# Altium PCB Posha_4 layers.PcbDoc
Units mm, origin at the board's own origin, x right, y up, seen from the top; angles counter-clockwise.
Board outline 60.96 x 45.21 mm, 4 copper layers (Top Layer, Layer 1, Layer 2, Bottom Layer), stack 0.603 mm thick; 42 components, 28 nets, 187 pads, 46 vias.
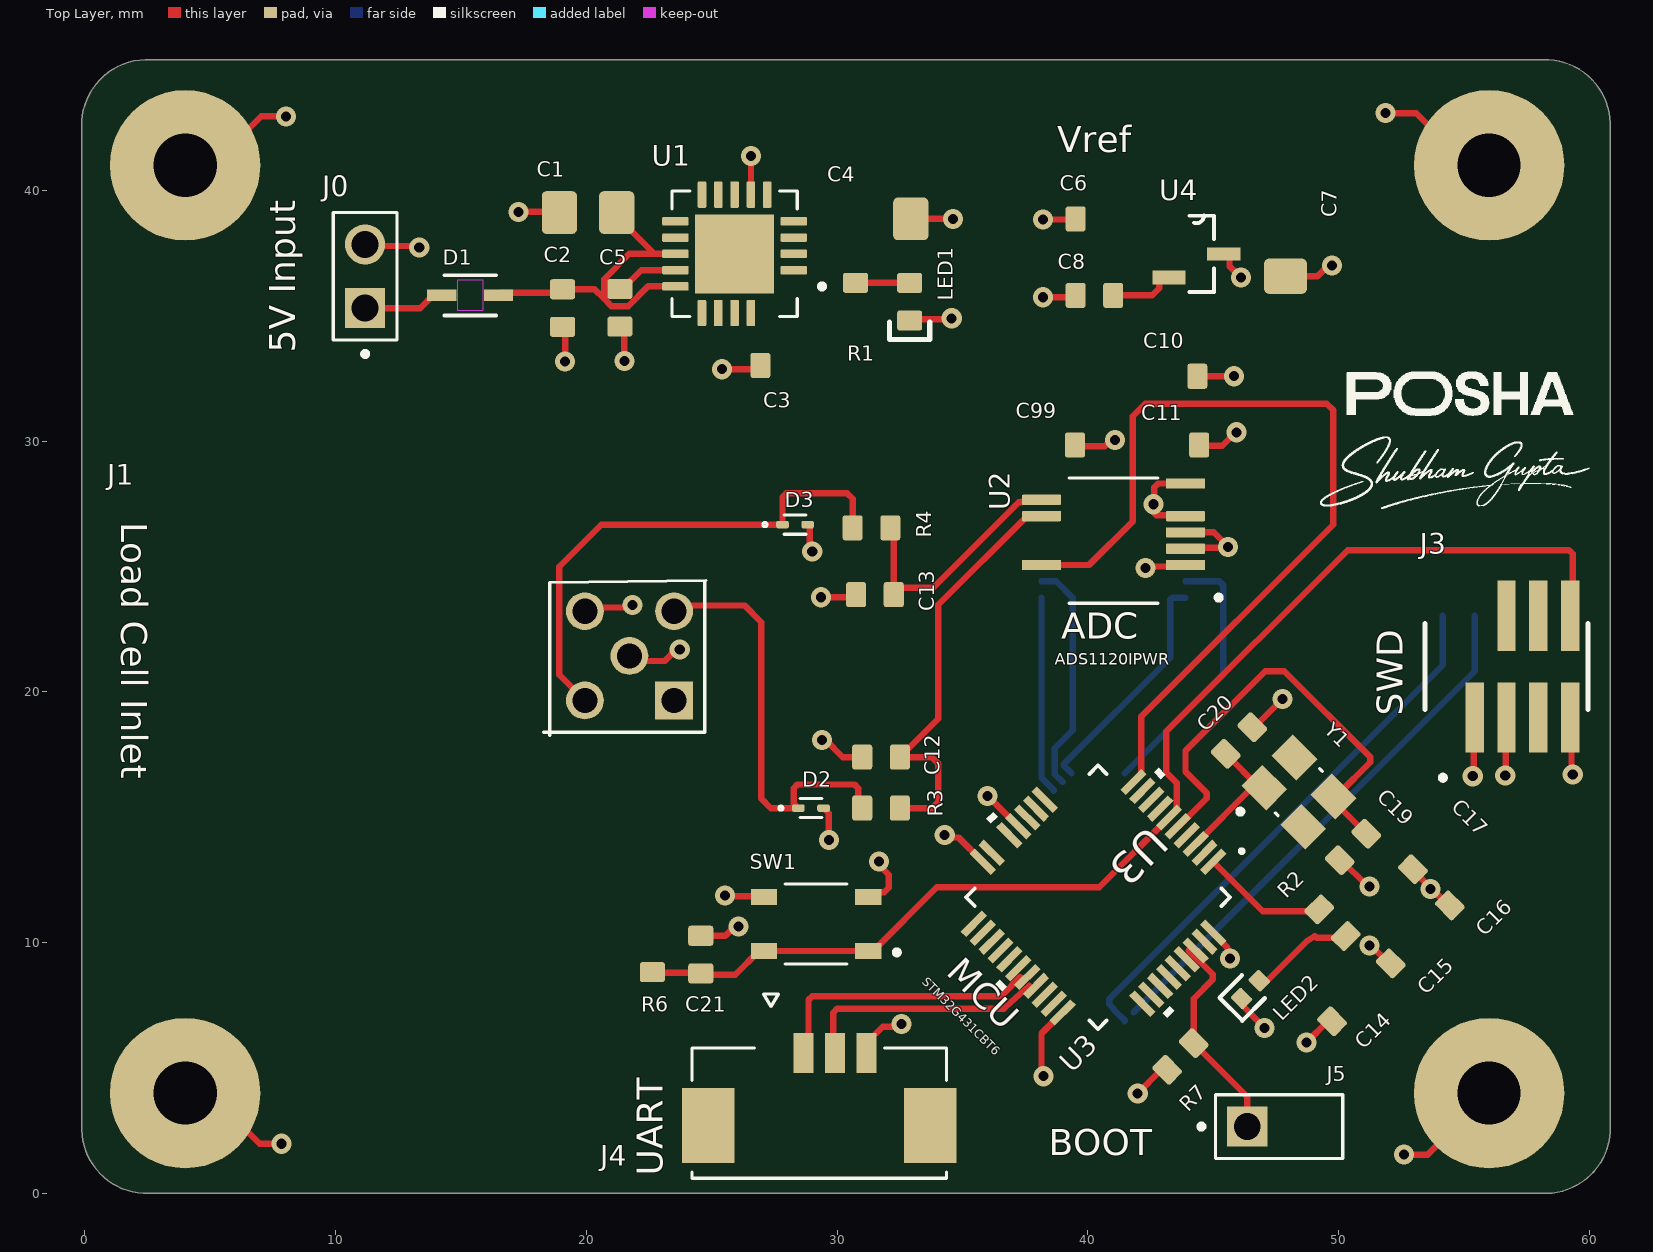
[diagram p0: Top Layer view]
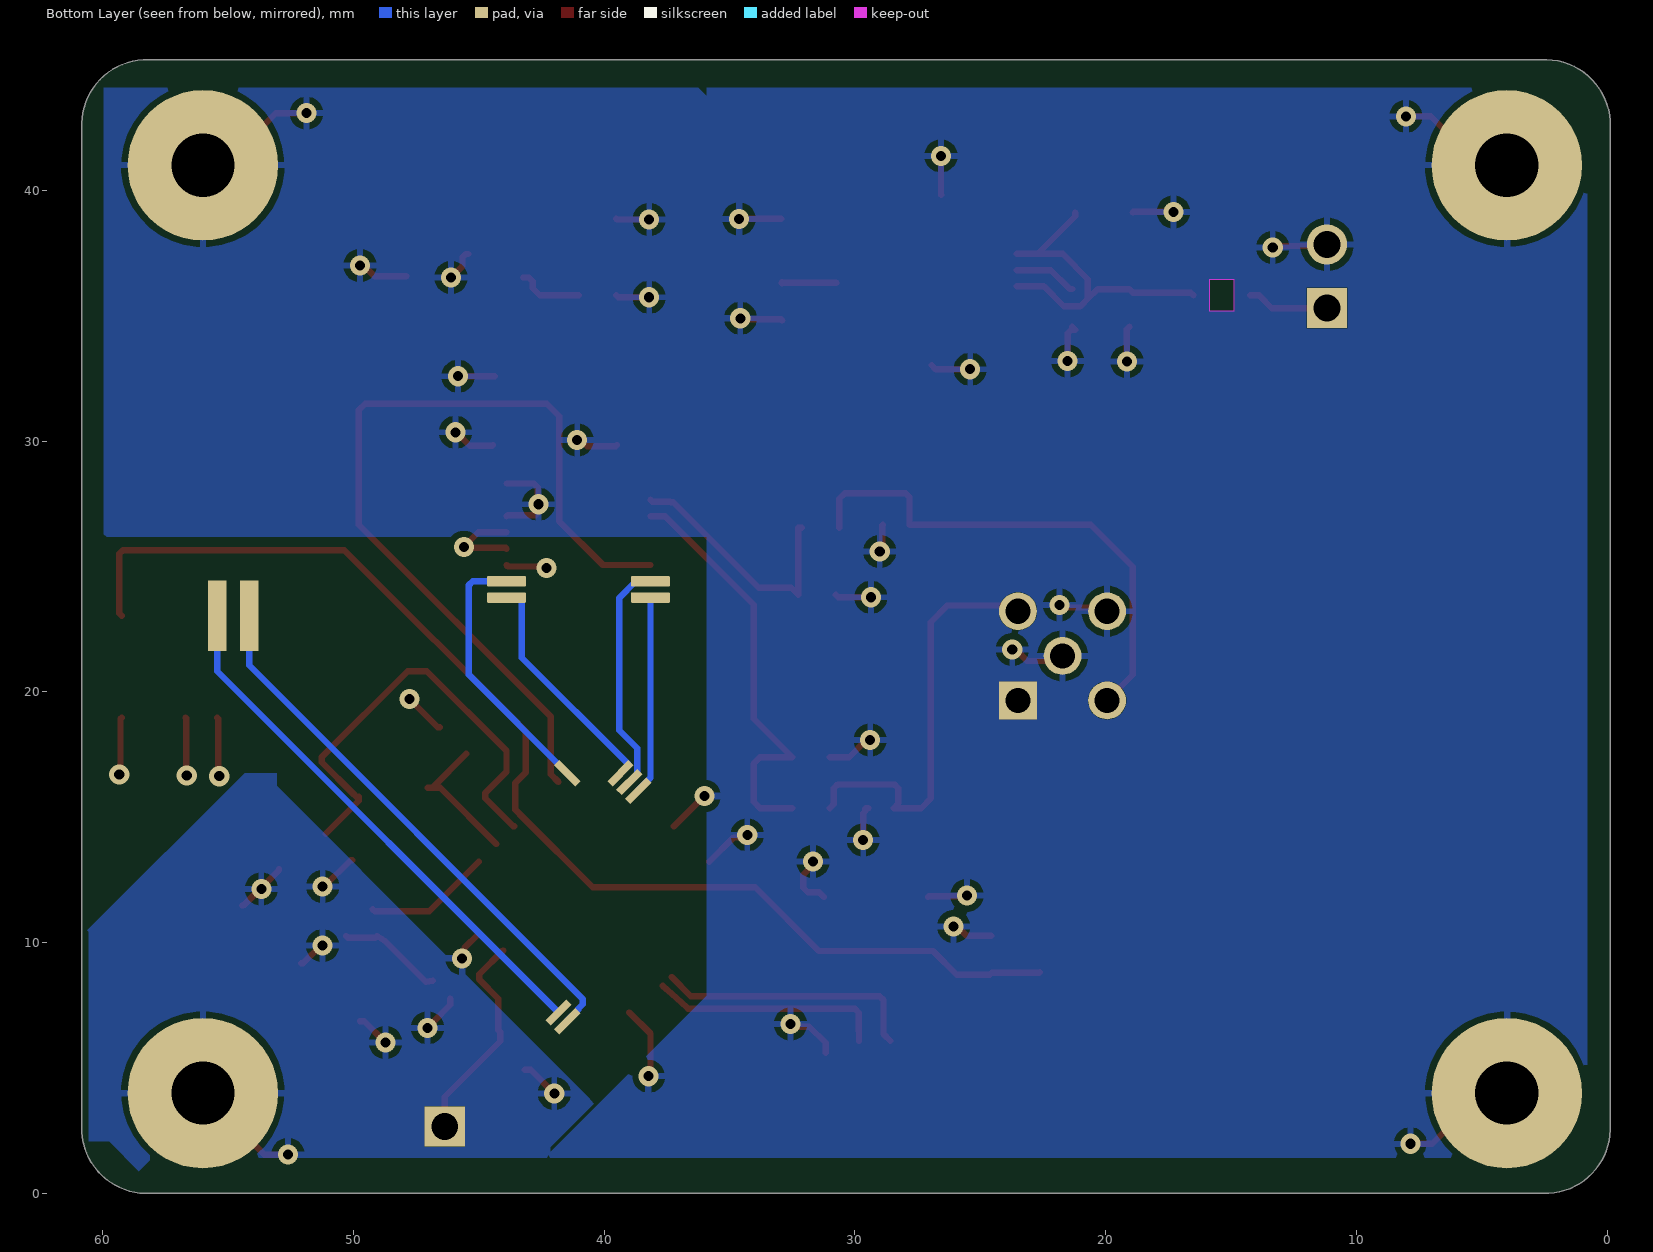
[diagram p1: Bottom Layer view, seen from below]
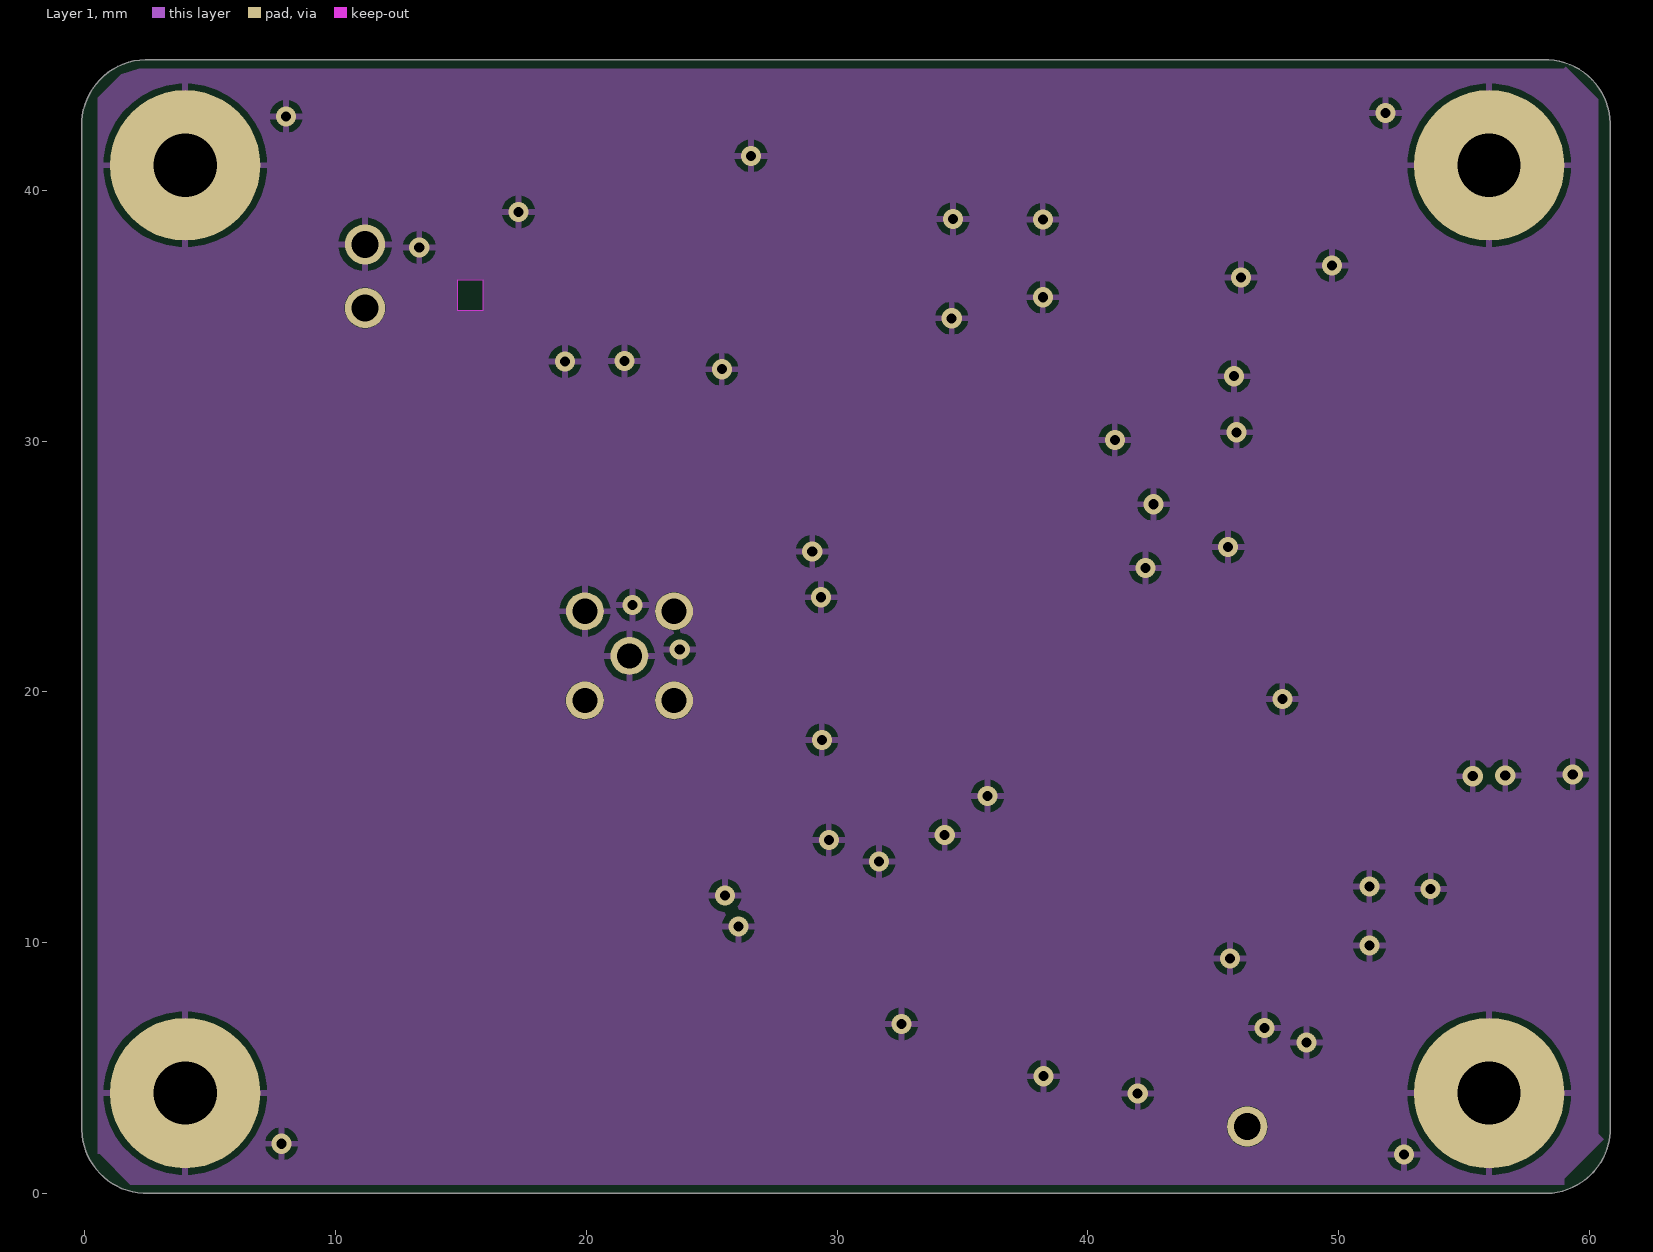
[diagram p2: Layer 1]
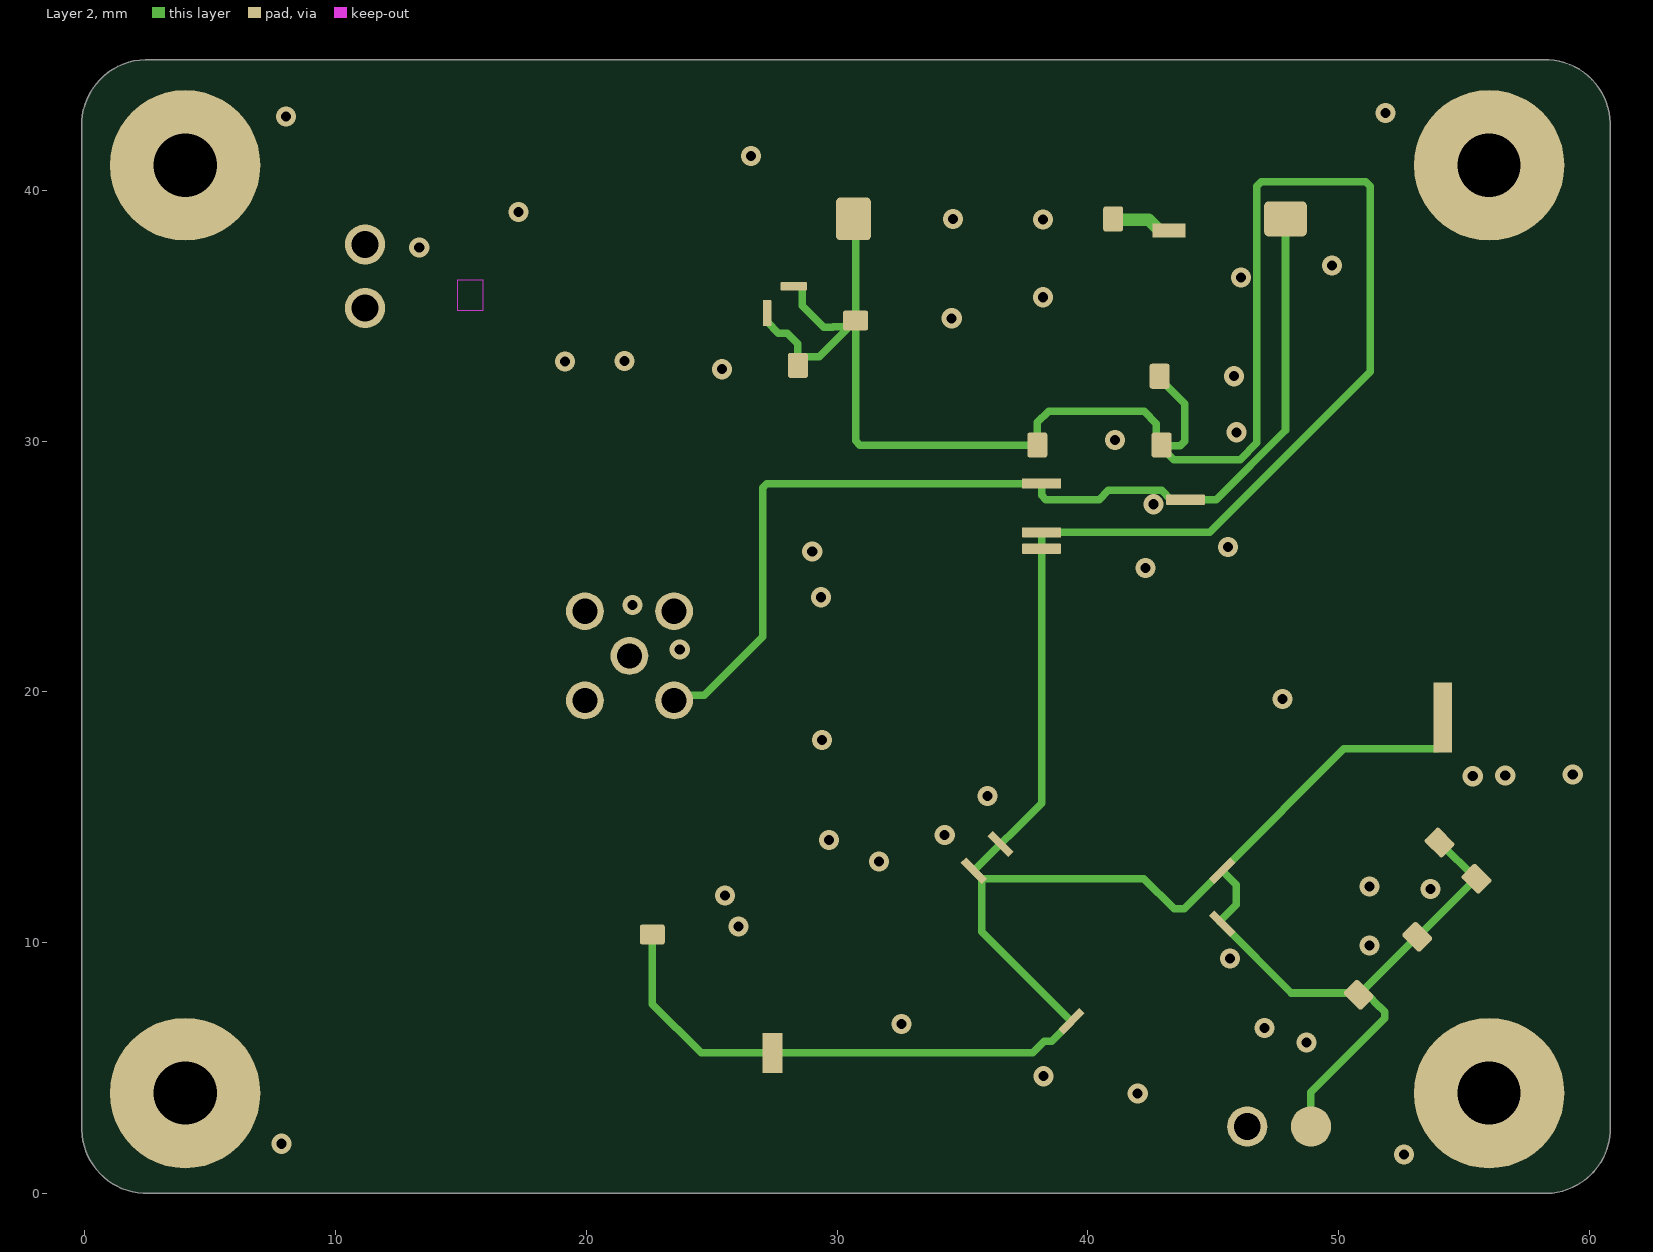
[diagram p3: Layer 2]
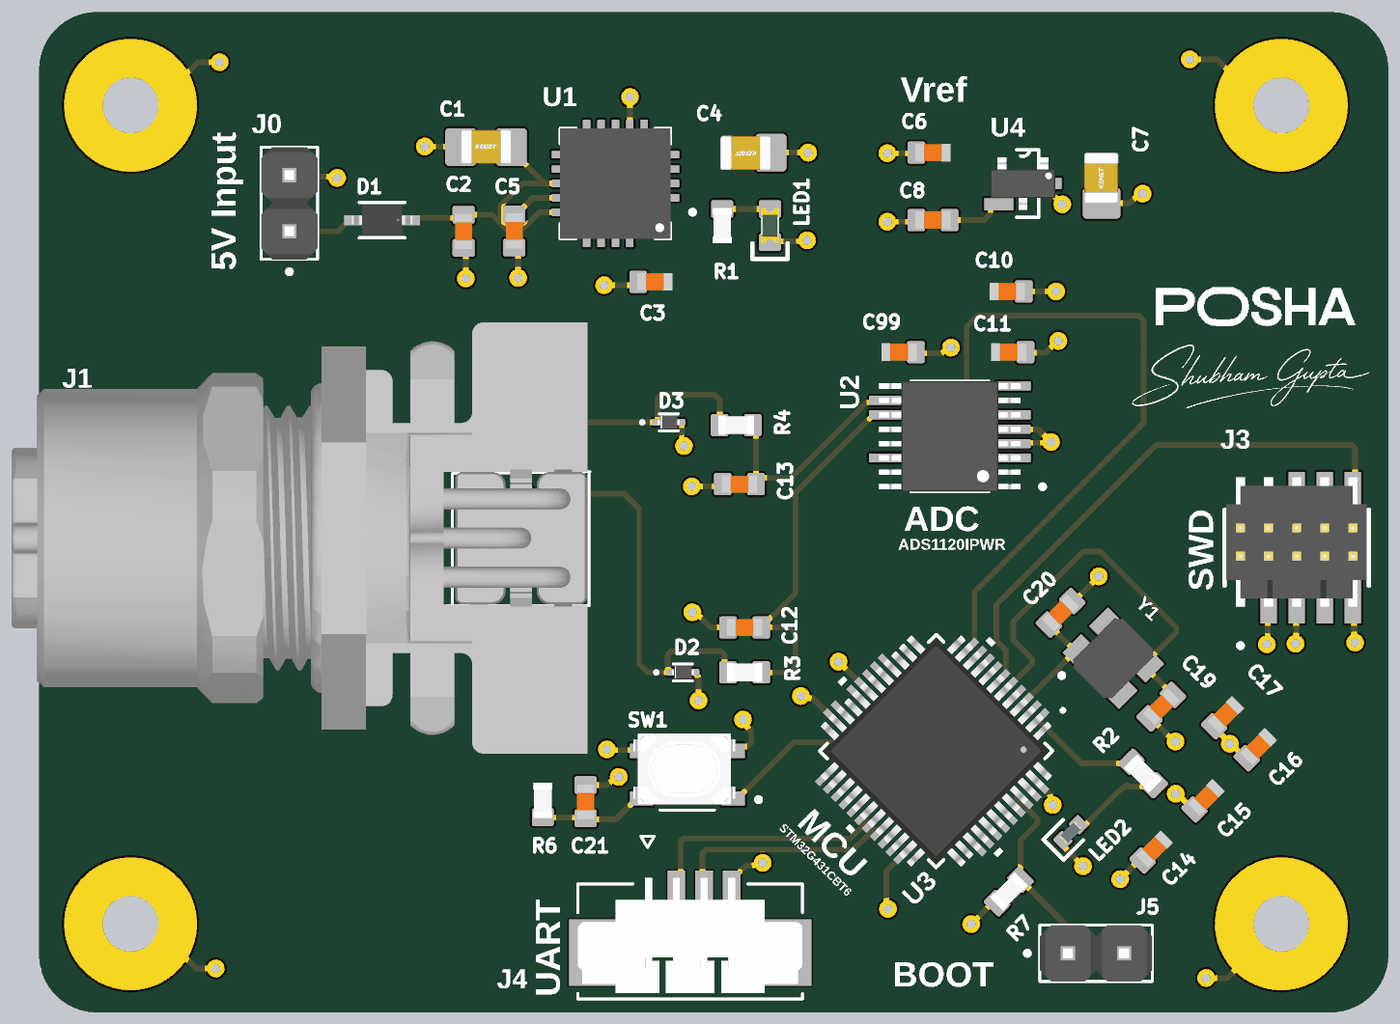
[diagram p4: 3D render of the assembled board from above, using the file's embedded part models]

## Layer stack, top to bottom
Top Solder: solder mask 0.0102, Solder Resist, Dk 3.5
Top Layer: signal copper 0.0356
Dielectric 2: prepreg 0.0711, PP-006, Dk 4.1
Layer 1: signal copper 0.035
Dielectric 1: dielectric 0.32, FR-4, Dk 4.8
Layer 2: signal copper 0.035
Dielectric 3: prepreg 0.0711, PP-006, Dk 4.1
Bottom Layer: signal copper 0.0356
Bottom Solder: solder mask 0.0102, Solder Resist, Dk 3.5

## Board outline
-0.127,2.54 -0.127,42.545 cw(c2.476,42.608) 2.413,45.212 58.166,45.212 cw(c58.229,42.608) 60.833,42.672 60.833,2.667 cw(c58.229,2.603) 58.293,0 2.54,0 cw(c2.476,2.603)

## Design rules (kind name [scope] priority, off if disabled: settings)
Clearance Clearance_1 [All] p1: gap=0.001 ignorepadtopadclearanceinfootprint=FALSE
Clearance [All] p2: gap=0.15 ignorepadtopadclearanceinfootprint=FALSE
MinimumSolderMaskSliver [All] p1: minsoldermaskwidth=0.12
PolygonConnect [All] p1: connectstyle=Relief reliefconductorwidth=0.254 reliefentries=4 polygonreliefangle="90 Angle" airgapwidth=0.254
RoutingVias [All] p1: holewidth=0.4 width=0.8 viastyle="Through Hole" minholewidth=0.3 minwidth=0.6 maxholewidth=0.711 maxwidth=1.27
SolderMaskExpansion [All] p1: expansion=0.102 istentingtop=FALSE
SupplyNets "Schematic Supply Nets_3" [InNet('VREF_3V3')] p1: voltage=0.000
SupplyNets "Schematic Supply Nets_2" [InNet('+3V3')] p2: voltage=0.000
SupplyNets "Schematic Supply Nets_1" [InNet('GND')] p3: voltage=0.000
SupplyNets "Schematic Supply Nets" [InNet('+5')] p4: voltage=0.000
Width Width_1 [All] p1: maxlimit=1 minlimit=0.15 preferedwidth=0.254
Width Width_power [All] p2: maxlimit=1 minlimit=0.254 preferedwidth=0.5
29 further rules are at their usual default settings.

## Components (designator, comment, footprint, x,y, rotation, side; value= is the part's Value field where it differs from the comment)
C1 "10uf" CAP_0805#1 20.066,39.116 r0 top
C2 "100nf" CAP_0603#1 19.05,35.306 r90 top
C3 "10uF" CAP_0603#2 27.686,33.02 r0 top
C4 "100nF" CAP_0805#2 31.794,38.862 r180 top
C5 "C0603" CAP_0603#1 21.336,35.318 r90 top
C6 "100nF" CAP_0603#3 40.259,38.862 r180 top
C7 "10uF" CAP_0805#2 47.879,37.719 r90 top
C8 "100nF" CAP_0603#1 40.259,35.814 r0 top
C10 "C0603" CAP_0603#2 43.612,32.588 r180 top
C11 "100nf" CAP_0603#2 43.688,29.845 r180 top
C12 "10nf" CAP_0603#1 31.75,17.399 r180 top
C13 "10nF" CAP_0603#1 31.508,23.876 r0 top
C14 "100nf" CAP_0603#2 50.267,7.391 r45 top
C15 "100nf" CAP_0603#2 52.603,9.703 r45 top
C16 "100nf" CAP_0603#2 54.966,12.014 r45 top
C17 "100nf" CAP_0603#2 53.492,13.462 r45 top
C19 "27pf" CAP_0603#1 50.571,13.818 r225 top
C20 "27pf" CAP_0603#1 46.025,18.059 r45 top
C21 "100nf" CAP_0603#1 24.562,9.525 r270 top
C99 "100nf" CAP_0603#2 38.735,29.845 r180 top
D1 "1N4148WX-TP" CR_SOD323_MCC 15.367,35.814 r180 top
D2 "ESD9B5.0ST5G" SODFL1006X40N 28.956,15.367 r0 top
D3 "ESD9B5.0ST5G" SODFL1006X40N 28.321,26.67 r0 top
J0 "B2B-XH-A" HARWIN_M20-9990246#1 11.176,36.576 r90 top
J1 "B5B-XH-A" JST_B5B-XH-A 21.717,21.438 r0 top
J3 "FTSH-105-01-X-DV-P-K-X" SAMTEC_FTSH-105-01-X-DV-P-K-X 56.693,21.006 r0 top
J4 "532610471" MOLEX_532610471 29.289,3.204 r0 top
J5 "M20-9990246" HARWIN_M20-9990246#2 47.625,2.667 r0 top
LED1 "GREEN" LED_0603_GREEN 32.893,35.56 r90 top
LED2 "BLUE" LED_0402_BLUE 46.482,8.128 r225 top
R1 "1K" RES_0603#1 30.734,35.56 r270 top
R2 "1K" RES_0603#2 49.751,10.795 r315 top
R3 "100R" RES_0603#2 31.75,15.367 r180 top
R4 "100R" RES_0603#2 31.369,26.543 r180 top
R6 "10K" RES_0603#1 22.631,9.576 r90 top
R7 "10k" RES_0603#2 43.688,5.461 r45 top
SW1 "SKRPABE010" SW_SKRPABE010 29.159,10.744 r180 top
U1 "TPS7A3301RGWR" QFN65P500X500X100-21N 25.91,37.47 r180 top
U2 "ADS1120IPWR" SOP65P640X120-16N 41.021,26.035 r180 top
U3 "STM32G431CBT6" LQFP48-7x7mm 40.404,11.811 r225 top
U4 "REF3033AIDBZR" SOT95P237X112-3N 44.323,37.465 r0 top
Y1 "ABM8G-12.000MHZ-18-D2Y-T" XTAL_ABM8G-12.000MHZ-18-D2Y-T 48.41,16.002 r45 top

## Footprints (in the part's own frame and the unit in brackets; to place one, negate y for a bottom-side part, rotate by r counter-clockwise, add the part's x,y. Pads: shape width x height; smd on the part's side, far side on the other; paste and mask are expansions set on the pad)
CAP_0603#1 [mm]
  rrect25% 0.8x1 smd: 1(-0.75,0) 2(0.75,0)
  body extent -0.8,-0.4 0.8,0.4, height 0.51
CAP_0603#2 [mm]
  rrect25% 0.8x1 smd: 1(-0.75,0)
  rrect25% 0.8x1 on Mid2: 2(0.75,0)
  body extent -0.8,-0.4 0.8,0.4, height 0.51
CAP_0603#3 [mm]
  rrect25% 0.8x1 on Mid2: 1(-0.75,0)
  rrect25% 0.8x1 smd: 2(0.75,0)
  body extent -0.8,-0.4 0.8,0.4, height 0.51
CAP_0805#1 [mm]
  rrect25% 1.4x1.7 smd: 1(-1.143,0) 2(1.143,0)
  body extent -1.15,-0.76 1.15,0.79, height 1.01
CAP_0805#2 [mm]
  rrect25% 1.4x1.7 smd: 1(-1.143,0)
  rrect25% 1.4x1.7 on Mid2: 2(1.143,0)
  body extent -1.15,-0.76 1.15,0.79, height 1.01
CR_SOD323_MCC [mil]
  rect 46x18 smd paste+0 mask+0: 1(-44.5,0) 2(44.5,0)
  Keep-Out Layer region: -19.5,-24.5 -19.5,24.5 19.5,24.5 19.5,-24.5
  silkscreen extent -41,-32 41,32, body extent -54,-26 54,26, height 45
HARWIN_M20-9990246#1 [mm]
  rect 1.605x1.605 / inner round 1.605 / far side rect 1.605x1.605 hole 1.07: 1(-1.27,0)
  round 1.605 hole 1.07: 2(1.27,0)
  silkscreen extent -3.2,-1.27 2.54,1.27, body extent -2.54,-1.27 2.54,1.27, height 8.74
HARWIN_M20-9990246#2 [mm]
  rect 1.605x1.605 / inner round 1.605 / far side rect 1.605x1.605 hole 1.07: 1(-1.27,0)
  round 1.605 on Mid2: 2(1.27,0)
  silkscreen extent -3.2,-1.27 2.54,1.27, body extent -2.54,-1.27 2.54,1.27, height 8.74
JST_B5B-XH-A [mil]
  rect 59.37x59.37 / inner round 59.37 / far side rect 59.37x59.37 hole 39.37: 1(70,-70)
  round 59.37 hole 39.37: 2(0,0) 3(70,70) 4(-70,-70) 5(-70,70)
  silkscreen extent -135,-125 120,118, body extent -909,-384 115,384, height 615
LED_0402_BLUE [mm]
  rrect25% 0.6x0.7 smd: A(-0.5,0) K(0.5,0)
  silkscreen extent -0.15,-0.65 1.1,0.65, body extent -0.5,-0.25 0.5,0.25, height 0.45
LED_0603_GREEN [mm]
  rrect25% 0.8x1 smd: A(0.75,0) K(-0.75,0)
  silkscreen extent -1.5,-0.8 -0.8,0.8, body extent -0.8,-0.4 0.8,0.4, height 0.6
LQFP48-7x7mm [mm]
  rect 1.194x0.305 on Mid2 paste+0 mask+0: 1(-4.25,2.75) 36(4.25,2.75)
  rect 1.194x0.305 smd paste+0 mask+0: 2(-4.25,2.25) 3(-4.25,1.75) 4(-4.25,1.25) 5(-4.25,0.75) 6(-4.25,0.25) 7(-4.25,-0.25) 8(-4.25,-0.75) 9(-4.25,-1.25) 10(-4.25,-1.75) 11(-4.25,-2.25) 25(4.25,-2.75) 26(4.25,-2.25) 27(4.25,-1.75) 28(4.25,-1.25) 29(4.25,-0.75) 30(4.25,-0.25) 31(4.25,0.25) 32(4.25,0.75) 33(4.25,1.25) 34(4.25,1.75) 35(4.25,2.25)
  rect 1.194x0.305 smd far side paste+0 mask+0: 12(-4.25,-2.75)
  rect 0.305x1.194 smd far side paste+0 mask+0: 13(-2.75,-4.25) 14(-2.25,-4.25) 15(-1.75,-4.25) 37(2.75,4.25) 38(2.25,4.25)
  rect 0.305x1.194 smd paste+0 mask+0: 16(-1.25,-4.25) 17(-0.75,-4.25) 18(-0.25,-4.25) 19(0.25,-4.25) 20(0.75,-4.25) 22(1.75,-4.25) 23(2.25,-4.25) 39(1.75,4.25) 40(1.25,4.25) 41(0.75,4.25) 42(0.25,4.25) 43(-0.25,4.25) 44(-0.75,4.25) 45(-1.25,4.25) 46(-1.75,4.25) 47(-2.25,4.25)
  rect 0.305x1.194 on Mid2 paste+0 mask+0: 21(1.25,-4.25) 24(2.75,-4.25) 48(-2.75,4.25)
  silkscreen extent -5.43,-5.35 5.35,5.35, body extent -4.5,-4.5 4.5,4.5, height 1.6
MOLEX_532610471 [mm]
  rect 0.8x1.6 on Mid2 mask+0.076: 1(-1.875,2.4)
  rect 0.8x1.6 smd mask+0.076: 2(-0.625,2.4) 3(0.625,2.4) 4(1.875,2.4)
  rect 2.1x3 smd mask+0.076: S1(-4.425,-0.5) S2(4.425,-0.5)
  silkscreen extent -5.07,-2.6 5.07,4.75, body extent -5.07,-2.33 5.07,2.87, height 3.4
QFN65P500X500X100-21N [mm]
  rrect25% 1.05x0.34 on Mid2: 1(-2.36,1.3)
  rrect25% 1.05x0.34 smd: 2(-2.36,0.65) 3(-2.36,0) 4(-2.36,-0.65) 5(-2.36,-1.3) 11(2.36,-1.3) 12(2.36,-0.65) 13(2.36,0) 14(2.36,0.65) 15(2.36,1.3)
  rrect25% 0.34x1.05 smd: 6(-1.3,-2.36) 7(-0.65,-2.36) 8(0,-2.36) 9(0.65,-2.36) 10(1.3,-2.36) 16(1.3,2.36) 17(0.65,2.36) 18(0,2.36) 19(-0.65,2.36)
  rrect25% 0.34x1.05 on Mid2: 20(-1.3,2.36)
  rect 3.15x3.15 smd paste-3: 21(0,0)
  silkscreen extent -3.58,-2.5 2.5,2.5, body extent -2.5,-2.5 2.5,2.5, height 1
RES_0603#1 [mm]
  rrect25% 0.8x1 smd: 1(-0.75,0)
  rrect25% 0.8x1 on Mid2: 2(0.75,0)
  body extent -0.8,-0.43 0.8,0.43, height 0.52
RES_0603#2 [mm]
  rrect25% 0.8x1 smd: 1(-0.75,0) 2(0.75,0)
  body extent -0.8,-0.43 0.8,0.43, height 0.52
SAMTEC_FTSH-105-01-X-DV-P-K-X [mil]
  rect 29x110 on Mid2 paste+0 mask+4.02: 01(-100,-80)
  rect 29x110 smd far side paste+0 mask+4.02: 02(-100,80) 04(-50,80)
  rect 29x110 smd paste+0 mask+4.02: 03(-50,-80) 05(0,-80) 06(0,80) 07(50,-80) 08(50,80) 09(100,-80) 10(100,80)
  silkscreen extent -128,-178 128,68, body extent -125,-105 125,125, height 240
SODFL1006X40N [mm]
  rrect50% 0.5x0.3 smd: 1(-0.5,0) 2(0.5,0)
  silkscreen extent -1.28,-0.38 0.43,0.38, body extent -0.5,-0.3 0.5,0.3, height 0.4
SOP65P640X120-16N [mm]
  rrect25% 1.57x0.41 smd far side: 1(-2.87,2.275) 2(-2.87,1.625) 15(2.87,1.625) 16(2.87,2.275)
  rrect25% 1.57x0.41 smd: 3(-2.87,0.975) 4(-2.87,0.325) 5(-2.87,-0.325) 6(-2.87,-0.975) 8(-2.87,-2.275) 10(2.87,-1.625) 11(2.87,-0.975) 14(2.87,0.975)
  rrect25% 1.57x0.41 on Mid2: 7(-2.87,-1.625) 9(2.87,-2.275) 12(2.87,-0.325) 13(2.87,0.325)
  silkscreen extent -4.29,-2.5 1.77,2.5, body extent -3.2,-2.5 3.2,2.5, height 1.2
SOT95P237X112-3N [mil]
  rect 52x22 on Mid2: 1(-43,37)
  rect 52x22 smd: 2(-43,-37)
  rect 52x20 smd: 3(43,0)
  silkscreen extent -11,-60 28,60, body extent -47,-57 47,57, height 44
SW_SKRPABE010 [mm]
  rect 1.05x0.65 smd: 1(-2.075,1.075) 2(2.075,1.075) 3(-2.075,-1.075) 4(2.075,-1.075)
  silkscreen extent -3.32,-1.6 1.23,1.6, body extent -2.16,-1.85 2.44,1.35, height 2.5
XTAL_ABM8G-12.000MHZ-18-D2Y-T [mm]
  rect 1.2x1.4 smd: 1(-0.85,1.1) 2(-0.85,-1.1) 3(0.85,-1.1) 4(0.85,1.1)
  silkscreen extent -2.3,-0.08 1.25,1.2, body extent -1.6,-1.24 1.6,1.24, height 0.99

## Part data
C1 C4 C7: library part CAP_0805, "Capacitor SMD 0805"
C2 C3 C5 C6 C8 C10 C11 C12 C13 C14 C15 C16 C17 C19 C20 C21 C99: library part CAP_0603, "Capacitor SMD 0603"
D1: "Description", Manufacturer_Name=MCC, Copyright="Copyright (C) 2025 Ultra Librarian. All rights reserved.", Manufacturer_Part_Number=1N4148WX-TP
D2 D3: "Clamp Ipp Tvs Diode Surface Mount SOD-923", Package="SOD-923 ON Semiconductor", Availability=Unavailable, MF="ON Semiconductor", MP=ESD9B5.0ST5G, Price=None, SnapEDA_Link=https://www.snapeda.com/parts/ESD9B5.0ST5G/ON%20Semiconductor/view-part/239806/?ref=snap
J0 J3: Package=None, Availability=Unavailable, Price=None
  J0: MF="{'manufacturer': u'JST Sales America Inc.'}", MP=B2B-XH-A
  J3: MF="{'manufacturer': u'Samtec Inc.'}", MP=FTSH-105-01-X-DV-P-K-X
J1: "Connector Header Through Hole 5 position 0.098 (2.50mm)", Package=None, Check_prices=https://www.snapeda.com/parts/B5B-XH-A/JST+Sales+America+Inc./view-part/?ref=eda, MF="JST Sales", MP=B5B-XH-A, SnapEDA_Link=https://www.snapeda.com/parts/B5B-XH-A/JST+Sales+America+Inc./view-part/?ref=snap
J4: "Connector Header Surface Mount, Right Angle 4 position 0.049 (1.25mm)", Package=None, Availability="In Stock", Check_prices=https://www.snapeda.com/parts/532610471/Molex/view-part/?ref=eda, MF=Molex, MP=532610471, Price=None, Purchase-URL=https://pricing.snapeda.com/search/part/532610471/?ref=eda, SnapEDA_Link=https://www.snapeda.com/parts/532610471/Molex/view-part/?ref=snap
J5: "2.54mm (0.1) Pitch SIL Vertical Throughboard Pin Header, 6.1mm mating pin height, tin, 2 contacts", Package=None, Check_prices=https://www.snapeda.com/parts/M20-9990246/Harwin/view-part/?ref=eda, MF=Harwin, MP=M20-9990246, SnapEDA_Link=https://www.snapeda.com/parts/M20-9990246/Harwin/view-part/?ref=snap
LED1: library part LED_0603_GREEN, "LED 0603 GREEN SMD"
LED2: library part LED_0402_BLUE, "LED 0402 BLUE SMD"
R1 R2 R3 R4 R6 R7: library part RES_0603, "Resistor SMD 0603"
SW1: "Switch Tactile N.O. SPST Button J-Bend 0.05A 16VDC 1.57N SMD Automotive T/R", Package=None, Check_prices=https://www.snapeda.com/parts/SKRPABE010/ALPS/view-part/?ref=eda, MF=ALPS, MP=SKRPABE010, SnapEDA_Link=https://www.snapeda.com/parts/SKRPABE010/ALPS/view-part/?ref=snap
U1: "1-A, high-PSRR, negative, adjustable low-dropout voltage regulator with enable 20-VQFN -40 to 125", Package="VQFN-20 Texas Instruments", Digi-Key_Part_Number=296-39502-1-ND, MF="Texas Instruments", MP=TPS7A3301RGWR, Purchase-URL=https://pricing.snapeda.com/search/part/TPS7A3301RGWR/?ref=eda, SnapEDA_Link=https://www.snapeda.com/parts/TPS7A3301RGWR/Texas%20Instruments/view-part/566218/?ref=snap
U2: "16-bit, 2-kSPS, 4-ch, low-power, small-size delta-sigma ADC with PGA, VREF, 2x IDACs & SPI interface", Package="TSSOP-16 Texas Instruments", Check_prices=https://www.snapeda.com/parts/ADS1120IPWR/Texas+Instruments/view-part/?ref=eda, MF="Texas Instruments", MP=ADS1120IPWR, SnapEDA_Link=https://www.snapeda.com/parts/ADS1120IPWR/Texas+Instruments/view-part/?ref=snap
U3: "Mainstream Arm Cortex-M4 MCU 170 MHz with 128 Kbytes of Flash memory, Math Accelerator, Medium Analog level integration", Manufacturer_Name=STMicroelectronics, Copyright="Copyright (C) 2025 Ultra Librarian. All rights reserved.", Manufacturer_Part_Number=STM32G431CBT6, RefDes=RefDes, Type=Type
U4: "3.3-V, 50-ppm/Â°C, 50-ÂµA in 3-pin SOT-23 package series (bandgap) voltage reference", Package="SOT-23-3 Texas Instruments", Check_prices=https://www.snapeda.com/parts/REF3033AIDBZR/Texas+Instruments/view-part/?ref=eda, MF="Texas Instruments", MP=REF3033AIDBZR, SnapEDA_Link=https://www.snapeda.com/parts/REF3033AIDBZR/Texas+Instruments/view-part/?ref=snap
Y1: "12 MHz Â±20ppm Crystal 18pF 120 Ohms 4-SMD, No Lead", Package="SMD-4 Abracon", Check_prices=https://www.snapeda.com/parts/ABM8G-12.000MHZ-18-D2Y-T/Abracon+LLC/view-part/?ref=eda, Digi-Key_Part_Number=535-10261-2-ND, MF=Abracon, MP=ABM8G-12.000MHZ-18-D2Y-T, Purchase-URL=https://pricing.snapeda.com/search/part/ABM8G-12.000MHZ-18-D2Y-T/?ref=eda, SnapEDA_Link=https://www.snapeda.com/parts/ABM8G-12.000MHZ-18-D2Y-T/Abracon+LLC/view-part/?ref=snap

## Free pads (board coordinates)
  round 6 hole 2.52: 1(4,41) 2(56,41) 3(4,4) 4(56,4)

## Via types
v1: diameter 0.8, hole 0.4, Top Layer to Bottom Layer, 46 vias

## Nets (pads, with @x,y where several pads share a name; then routed paths per layer and width w, separated by ;. In a path a pad name is that pad's centre, name@x,y a point inside that pad or via, vN(x,y) a via of type N, cw(c..) or ccw(c..) an arc to the next point about the centre after c; other vN are vias at no path point)
+3V3: C3.2 C4.2 C10.2 C11.2 C14.2 C15.2 C16.2 C17.2 C99.2 J3.01 J4.1 J5.2 R1.2 R6.2 U1.1 U1.20 U2.12 U2.13 U3.1 U3.21 U3.24 U3.36 U3.48 | length 169.3
  Layer 2 w0.3: R6.2 22.631,7.544 24.572,5.604 37.794,5.604 38.264,6.074 38.557,6.074 U3.36 35.769,10.436 U3.24@35.769,12.557 ; U1.20 27.21,34.755 27.656,34.309 28.011,34.309 28.436,33.884 C3.2 ; U1.1 28.583,36.17 28.603,36.15 28.603,35.405 29.464,34.544 29.832,34.544 29.848,34.56 R1.2@30.384,34.56 ; C3.2@28.436,33.12 28.686,33.37 29.294,33.37 30.384,34.46 R1.2@30.384,34.56 ; C4.2@30.607,38.862 30.734,38.735 R1.2 ; C10.2 42.862,32.488 43.866,31.484 43.866,29.995 43.69,29.82 42.963,29.82 C11.2 ; U3.1@45.197,12.715 43.834,11.351 43.437,11.351 42.23,12.557 U3.24@35.769,12.557 ; J5.2 48.895,4.039 51.844,6.988 51.844,7.236 51.632,7.448 51.624,7.448 51.15,7.922 C14.2 ; C17.2 54.035,13.992 55.483,12.545 C16.2 55.471,12.545 53.159,10.233 C15.2 53.121,10.233 50.81,7.922 C14.2 ; J3.01 54.153,17.945 53.934,17.727 50.209,17.727 U3.1 45.923,12.303 45.923,11.506 45.262,10.845 45.262,10.842 U3.48 48.112,7.992 50.726,7.992 C14.2 ; R1.2@30.384,34.56 30.634,34.81 R1.2 ; R1.2 30.734,30.021 30.91,29.845 C99.2 37.985,30.746 38.43,31.191 42.24,31.191 42.734,30.697 42.734,30.049 C11.2 ; U3.24@35.769,12.557 U3.24 38.151,15.568 U2.13 U2.12 44.851,26.36 51.257,32.766 51.257,40.159 51.081,40.335 46.912,40.335 46.736,40.159 46.736,29.929 46.072,29.266 43.417,29.266 42.938,29.745 C11.2
+5: C6.1 U4.1 | length 2.4
  Layer 2 w0.5: C6.1 41.034,38.837 42.418,38.837 42.85,38.405 U4.1
ADC_DRDY: U2.14 U3.11 | length 35
  Top Layer w0.254: U2.14 40.046,25.06 41.783,26.797 41.783,30.988 42.291,31.496 49.53,31.496 49.784,31.242 49.784,26.67 42.133,19.019 42.133,16.722 U3.11
GND: C1.1 C2.1 C3.1 C4.1 C5.1 C6.2 C7.1 C8.1 C10.1 C11.1 C12.2 C13.1 C14.1 C15.1 C16.1 C17.1 C19.2 C20.2 C21.1 C99.1 D2.2 D3.2 J0.2 J1.2 J1.5 J3.03 J3.05 J3.09 J4.4 LED1.K LED2.K pad.1 pad.2 pad.3 pad.4 R7.1 SW1.3 SW1.4 U1.7 U2.3 U2.4 U2.5 U2.6 U2.8 U3.19 U3.23 U3.35 U3.47 U4.3 | length 96
  Top Layer w0.254: pad.3 4.89,4 6.274,2.616 6.337,2.616 6.972,1.981 v1(7.849,1.981) ; pad.1 5.088,41 7.039,42.951 v1(8.026,42.951) ; J0.2 11.239,37.782 13.271,37.782 v1(13.335,37.719) ; v1(17.297,39.141) 18.898,39.141 C1.1 ; C2.1 19.152,34.454 v1(19.152,33.172) ; J1.5 20.089,23.365 21.74,23.365 v1(21.844,23.47) ; C5.1@21.209,34.442 C5.1@21.21,34.442 ; C5.1 C5.1@21.21,34.442 ; v1(21.514,33.198) 21.514,34.295 21.366,34.442 C5.1@21.21,34.442 ; J1.2 21.92,21.234 23.119,21.234 23.576,21.692 v1(23.724,21.692) ; C21.1 25.545,10.275 25.913,10.643 v1(26.06,10.643) ; v1(25.4,32.868) 26.784,32.868 C3.1 ; v1@25.631,11.783 v1(25.527,11.887) 25.561,11.853 27.05,11.853 SW1.4 ; U1.7 26.564,39.834 26.564,41.373 v1(26.568,41.377) ; D3.2@28.891,26.67 28.914,26.647 28.914,25.696 v1(29.007,25.603) ; v1(29.362,23.774) 30.656,23.774 C13.1 ; v1(29.388,18.085) 29.536,18.085 30.221,17.399 C12.2 ; D2.2 29.556,15.367 29.579,15.344 29.579,15.244 29.667,15.156 v1(29.667,14.097) ; J4.4 31.164,6.004 31.813,6.652 32.458,6.652 v1(32.563,6.756) ; SW1.3 31.432,12.017 31.88,12.017 32.055,12.192 32.055,12.705 31.674,13.086 v1(31.674,13.233) ; LED1.K 32.938,34.855 34.525,34.855 v1(34.569,34.9) ; C4.1 v1(34.62,38.862) ; v1(34.29,14.3) 34.394,14.196 34.838,14.196 U3.23 ; v1(35.992,15.85) 36.002,15.85 37.212,14.639 U3.19 ; v1(38.202,35.738) 39.433,35.738 C8.1 ; v1(38.202,38.837) 39.484,38.837 C6.2 ; v1(38.227,4.674) 38.151,4.75 38.151,6.375 U3.35 ; C99.1 39.536,29.794 40.67,29.794 40.924,30.048 v1(41.072,30.048) ; v1(41.986,3.988) 42.929,4.931 R7.1 ; v1(42.291,24.943) 42.35,25.001 43.832,25.001 U2.3 ; U2.4 43.926,25.745 45.557,25.745 v1(45.593,25.781) 45.014,26.36 U2.5 ; U2.6 43.853,27.048 42.725,27.048 42.649,27.124 42.649,27.455 v1(42.621,27.483) 42.649,27.511 42.649,28.161 42.798,28.31 U2.8 ; C10.1 v1(45.822,32.588) ; C11.1 44.463,29.82 45.352,29.82 45.886,30.353 v1(45.923,30.353) ; U3.47 45.001,10.361 45.565,9.797 45.565,9.477 v1(45.669,9.373) ; U4.3 45.52,37.465 45.647,37.338 45.647,36.979 v1(46.101,36.525) ; LED2.K 46.128,7.53 46.489,7.17 46.489,7.156 v1(47.041,6.604) ; C20.2 46.631,18.59 v1(47.752,19.71) ; C7.1 49.154,36.576 49.585,37.008 v1(49.733,37.008) ; v1(48.717,6.02) 49.558,6.861 C14.1 ; C19.2 50.109,13.287 51.153,12.243 v1(51.22,12.243) ; v1(51.232,9.881) 51.298,9.881 52.006,9.172 C15.1 ; v1(51.867,43.078) 53.088,43.078 55.166,41 pad.2 ; v1(52.603,1.549) 53.549,1.549 pad.4 ; C17.1 52.962,12.891 53.67,12.182 v1(53.67,12.141) 53.724,12.141 54.381,11.484 C16.1 ; v1(55.347,16.637) 55.385,16.675 55.385,18.936 J3.03 ; v1(56.642,16.662) 56.667,16.688 56.667,18.948 J3.05 ; J3.09 59.284,18.923 59.284,16.764 v1(59.334,16.713)
NetC1_2: C1.2 C2.2 D1.1 U1.13 U1.15 | length 14
  Top Layer w0.254: D1.1 16.599,35.916 18.91,35.916 C2.2 20.326,36.056 20.708,35.674 ; C1.2 21.209,38.966 22.662,37.513 ; U1.15 22.46,36.17 21.673,35.382 20.999,35.382 20.708,35.674 ; U1.13 21.715,37.47 20.708,36.462 20.708,35.674
NetC5_2: C5.2 U1.14 | length 2.5
  Top Layer w0.254: C5.2 21.436,36.068 22.188,36.82 U1.14
NetC8_2: C8.2 U4.2 | length 2.7
  Top Layer w0.254: C8.2 42.57,35.814 42.85,36.093 42.85,36.373 43.002,36.525 U4.2
NetC12_1: C12.1 R3.1 U2.11 | length 17.1
  Top Layer w0.254: R3.1 33.782,15.367 34.036,15.621 34.036,17.145 33.782,17.399 C12.1 34.036,18.935 34.036,23.475 37.571,27.01 U2.11
NetC13_2: C13.2 R4.1 U2.10 | length 10.3
  Top Layer w0.254: R4.1 32.258,26.543 C13.2 32.258,23.882 32.531,24.155 33.833,24.155 37.236,27.559 37.344,27.559 37.367,27.582 38.073,27.582 U2.10
NetC19_1: C19.1 U3.6 Y1.3 | length 18.2
  Top Layer w0.254: U3.6 43.622,14.639 44.739,15.756 44.739,15.967 43.891,16.815 43.891,17.653 47.066,20.828 47.828,20.828 51.254,17.403 51.254,17.192 50.013,15.951 49.887,15.825 Y1.3 49.789,15.66 C19.1
NetC20_1: C20.1 U3.4 Y1.1 | length 5.8
  Top Layer w0.254: U3.4 46.54,16.179 Y1.1 46.845,16.179 C20.1
NetD1_2: D1.2 J0.1 | length 3.3
  Top Layer w0.254: J0.1 13.373,35.306 13.881,35.814 D1.2
NetD2_1: D2.1 J1.3 R3.2 | length 17
  Top Layer w0.254: J1.3 23.724,23.444 26.314,23.444 26.975,22.784 26.975,15.748 27.356,15.367 D2.1 28.356,15.367 28.333,15.39 28.333,15.49 28.267,15.556 28.267,16.158 28.416,16.307 30.691,16.307 30.84,16.158 30.84,15.527 R3.2
NetD3_1: D3.1 J1.4 R4.2 | length 20.6
  Top Layer w0.254: J1.4 18.918,20.68 18.918,24.989 20.599,26.67 D3.1 27.821,27.766 27.97,27.915 30.404,27.915 30.619,27.699 R4.2
NetJ5_1: J5.1 R7.2 U3.45 | length 8.7
  Top Layer w0.254: 44.021,9.69 44.031,9.69 44.98,8.741 44.98,8.531 44.218,7.769 44.218,6.519 44.148,6.448 44.148,6.062 R7.2 46.355,3.855 J5.1
NetLED1_A: LED1.A R1.1 | length 2.2
  Top Layer w0.254: R1.1 LED1.A
NetLED2_A: LED2.A R2.2 | length 4.2
  Top Layer w0.254: LED2.A 47.116,8.446 48.725,10.056 49.044,10.265 49.115,10.194 50.211,10.194 R2.2
NetR2_1: R2.1 U3.2 | length 5.1
  Top Layer w0.254: U3.2 46.971,11.255 49.15,11.255 R2.1
NRST: C21.2 J3.10 R6.1 SW1.1 SW1.2 U3.7 | length 48.8
  Top Layer w0.254: R6.1 22.657,8.8 24.536,8.8 C21.2 24.618,8.718 25.933,8.718 26.884,9.669 SW1.2 SW1.1 31.434,9.669 33.979,12.214 40.454,12.214 U3.7 43.547,15.307 43.547,16.366 43.129,16.784 43.129,18.425 50.358,25.654 59.186,25.654 59.334,25.505 59.334,23.139 J3.10
SPI_CS: U2.2 U3.12 | length 10.7
  Bottom Layer w0.254: U3.12 45.39,20.685 45.39,24.261 45.241,24.41 U2.2
SPI_MISO: U2.15 U3.14 | length 9.3
  Bottom Layer w0.254: U2.15 38.731,24.41 39.395,23.746 39.395,18.466 38.676,17.746 38.676,16.722 U3.14
SPI_MOSI: U2.16 U3.15 | length 7.9
  Bottom Layer w0.254: U2.16 38.151,16.575 38.637,16.09 U3.15
SPI_SCK: U2.1 U3.13 | length 9.5
  Bottom Layer w0.254: U3.13 39.029,17.075 39.029,17.111 43.284,21.366 43.284,23.682 43.362,23.76 U2.1
SWCLK: J3.04 U3.38 | length 21.5
  Bottom Layer w0.254: U3.38 55.423,20.819 J3.04
SWDIO: J3.02 U3.37 | length 21.9
  Bottom Layer w0.254: U3.37 41.465,6.897 41.035,7.328 41.035,7.359 40.85,7.543 40.85,7.754 54.153,21.057 J3.02
UART_RX: J4.3 U3.32 | length 9.4
  Top Layer w0.254: J4.3@29.835,6.083 29.843,6.756 29.843,7.212 29.992,7.36 36.54,7.36 36.638,7.36 36.71,7.425 37.307,7.961 37.657,8.275
UART_TX: J4.2 U3.31 | length 10.6
  Top Layer w0.254: J4.2@28.585,6.083 28.858,6.356 28.858,7.714 29.007,7.863 36.538,7.863 37.304,8.629
VREF_3V3: C7.2 J1.1 U2.7 U2.9 | length 41.9
  Layer 2 w0.3: J1.1 23.708,19.873 24.699,19.873 27.026,22.2 27.026,28.134 27.201,28.31 U2.9 38.151,27.836 38.327,27.66 40.445,27.66 40.819,28.034 42.937,28.034 43.311,27.66 U2.7 45.11,27.66 47.879,30.429 C7.2
pads on no net: J3.06 J3.07 J3.08 J4.S1 J4.S2 U1.2 U1.3 U1.4 U1.5 U1.6 U1.8 U1.9 U1.10 U1.11 U1.12 U1.16 U1.17 U1.18 U1.19 U1.21 U3.3 U3.5 U3.8 U3.9 U3.10 U3.16 U3.17 U3.18 U3.20 U3.22 U3.25 U3.26 U3.27 U3.28 U3.29 U3.30 U3.33 U3.34 U3.39 U3.40 U3.41 U3.42 U3.43 U3.44 U3.46 Y1.2 Y1.4

## Polygon pours and split planes (outlines as drawn)
GND on Bottom Layer "GND_L04_P010" (solid, pour order 10): 1.27,44.145 0.787,43.663 0.787,1.422 42.215,1.422 42.291,1.499 35.916,7.874 35.916,44.094 0.889,44.094 0.838,44.044
GND on Bottom Layer "GND_L04_P011" (solid, remove dead copper, pour order 11): 34.49,42.338 36.246,44.094 59.944,44.094 59.944,26.289 59.842,26.187 34.49,26.187
GND on Bottom Layer "GND_L04_P013" (solid, remove dead copper, pour order 13): 40.64,3.835 53.061,16.256 53.061,16.764 54.331,16.764 60.604,10.49 60.554,10.439 60.554,2.083 59.741,2.083 58.547,0.889 58.014,1.422 42.155,1.422 42.155,1.838 40.411,3.581
GND on Layer 1 "GND_L02_P001" (solid, remove dead copper, pour order 1): 1.448,44.628 0.508,43.688 0.508,1.575 0.584,1.575 1.803,0.356 59.004,0.356 59.004,0.584 60.579,2.159 60.35,2.388 60.35,43.637 59.055,44.933 58.979,44.856 2.159,44.856

## Silkscreen, mask and mechanical layers (free items; w line width, h text height)
Top Overlay:
  drawing of 9 lines, arcs and shapes, not listed
  text "Vref" at 38.786,41.17 h1.8
  text "5V Input" at 8.75,33.528 h1.8 r90
  text "Load Cell Inlet" at 1.088,26.772 h1.8 r270
  text "ADC" at 38.937,21.764 h1.8
  text "ADS1120IPWR" at 38.683,20.914 h0.8
  text "SWD" at 52.912,19.047 h1.8 r90
  text "MCU" at 34.052,8.523 h1.8 r315
  text "STM32G431CBT6" at 33.278,8.312 h0.6 r315
  text "BOOT" at 38.43,1.165 h1.8
  text "UART" at 23.397,0.713 h1.8 r90

## Text inside footprints (layer, text, board x,y; h text height)
D1: Mechanical 13 "*" at 16.332,36.449 h1.27 r180
LED1: Mechanical 13 "+" at 32.285,36.877 h0.5 r90
LED2: Mechanical 13 "+" at 48.173,9.1 h0.5 r225